# Altium PCB motordriver_mnt.PcbDoc (part 3 of 3)
Units mm, origin at the board's own origin, x right, y up, seen from the top; angles counter-clockwise.
Board outline 134.2 x 59.7 mm, 4 copper layers (Top Layer, Mid-Layer 2, Mid-Layer 1, Bottom Layer); 185 components, 161 nets, 637 pads, 1528 vias.
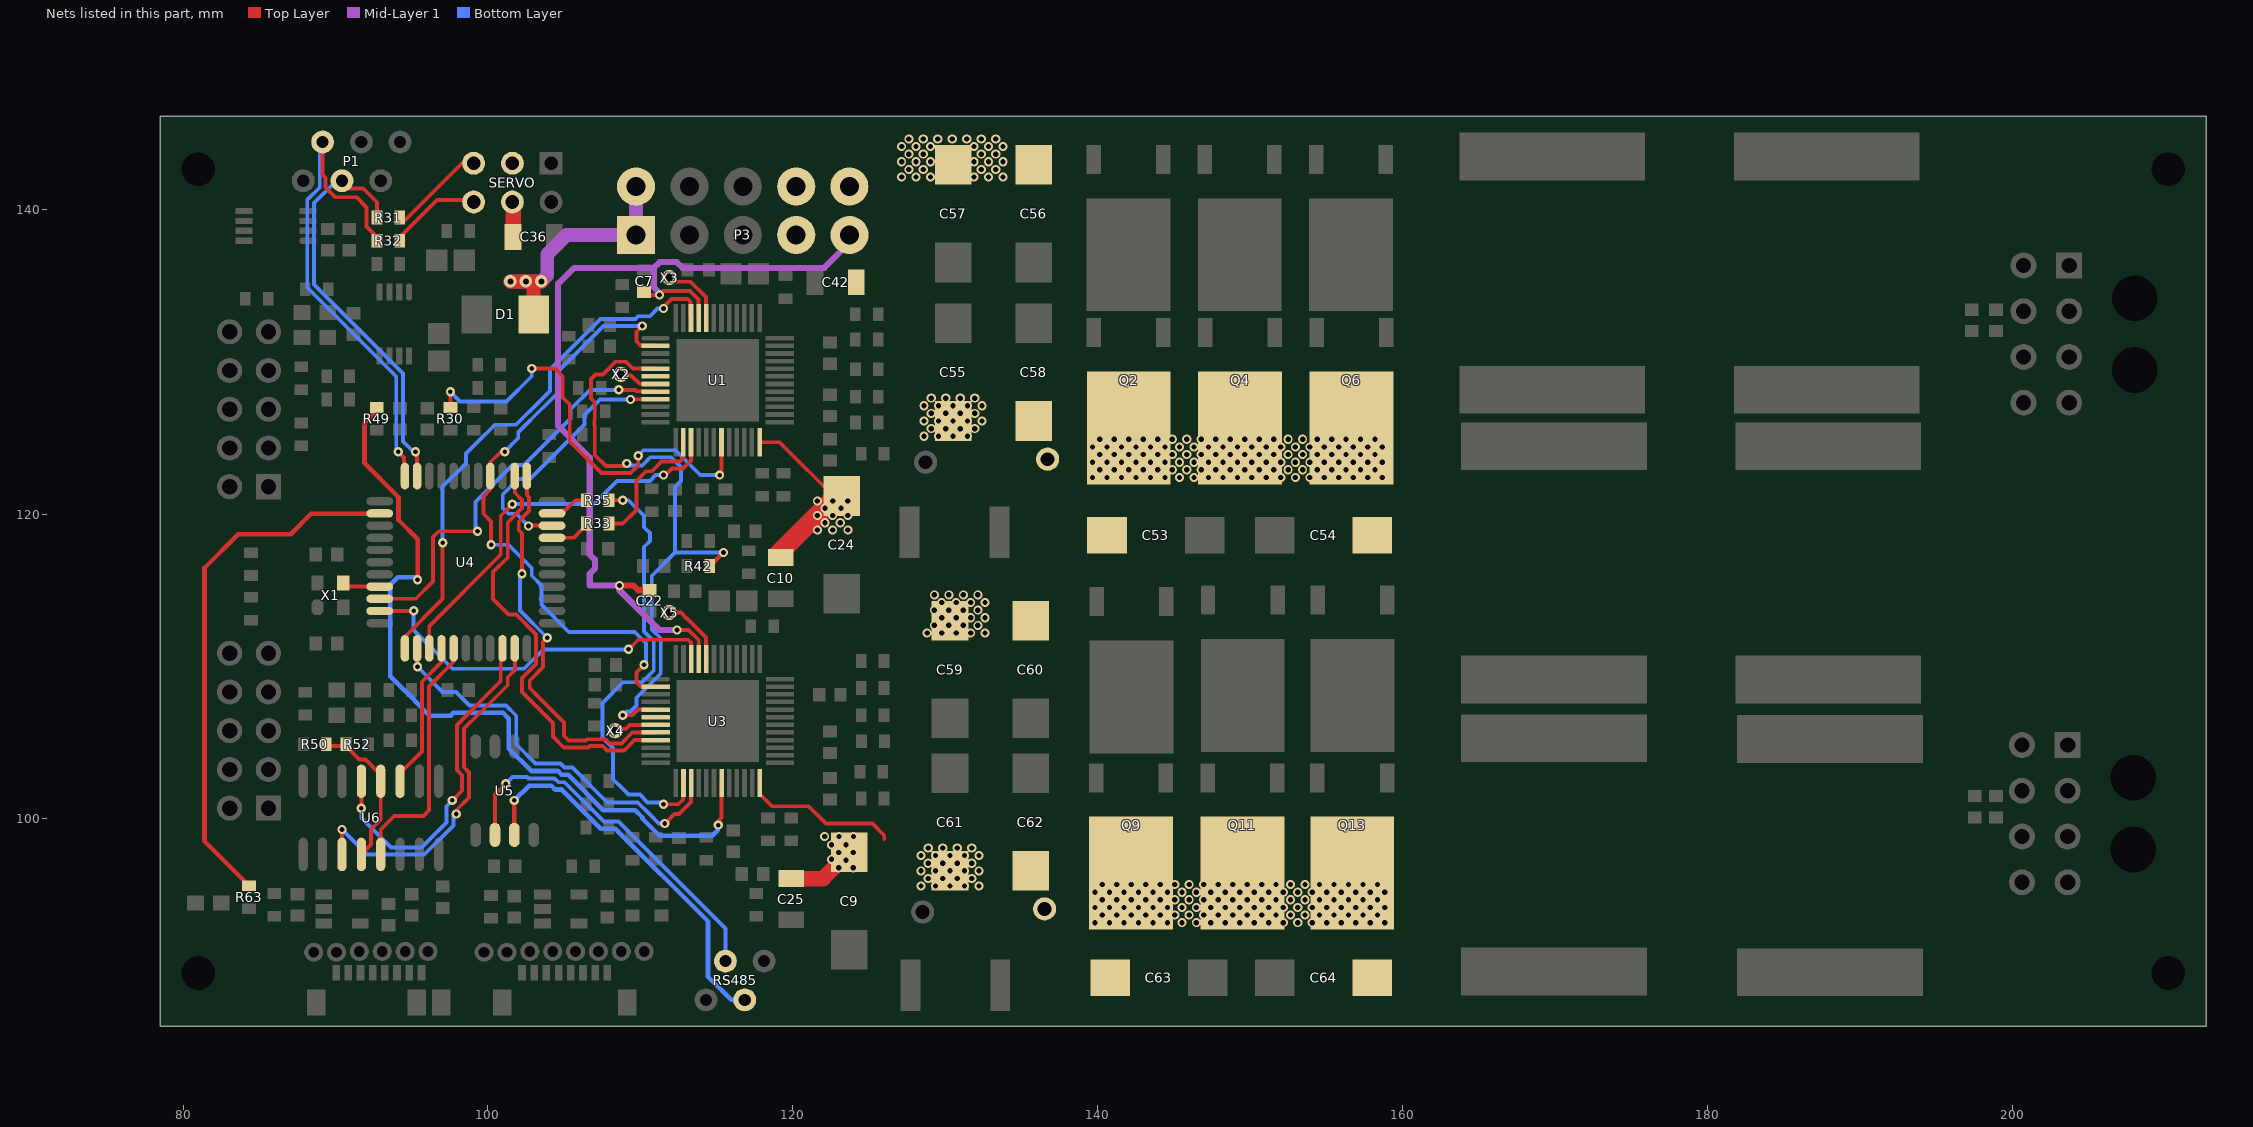
[diagram p5: the nets of this part, all layers, seen from the top]

## Via types
v1: diameter 0.6, hole 0.35, Top Layer to Bottom Layer, tented both sides, 1228 vias
v2: diameter 0.61, hole 0.305, Top Layer to Bottom Layer, tented both sides, 235 vias
v3: diameter 0.66, hole 0.33, Top Layer to Bottom Layer, tented top, 50 vias
v4: diameter 0.813, hole 0.406, Top Layer to Bottom Layer, tented both sides, 6 vias
v5: diameter 0.7, hole 0.4, Top Layer to Bottom Layer, tented both sides, 4 vias
v6: diameter 0.61, hole 0.305, Top Layer to Bottom Layer, 2 vias
v7: diameter 0.7, hole 0.4, Top Layer to Bottom Layer, tented bottom, 2 vias
v8: diameter 0.61/0.61/0.61/0.61 (per signal layer), hole 0.305, Top Layer to Bottom Layer, tented both sides, 1 vias

## Nets (pads, with @x,y where several pads share a name; then routed paths per layer and width w, separated by ;. In a path a pad name is that pad's centre, name@x,y a point inside that pad or via, vN(x,y) a via of type N, cw(c..) or ccw(c..) an arc to the next point about the centre after c; other vN are vias at no path point) (continued)
NetR30_2: R30.2 U1.19 | length 28.9
  Top Layer w0.254: R30.2@97.536,126.988 v8(97.536,128.016) ; v2(102.87,129.54) 104.394,129.54 104.902,129.032 104.902,127.644 105.359,127.187 105.359,124.765 107.442,122.682 109.356,122.682 109.855,123.181 v2(109.855,123.825) ; v2@115.312,122.678 U1.19@115.312,124.703
  Bottom Layer w0.254: v8(97.536,128.016) 98.171,127.381 101.219,127.381 102.87,129.032 v2(102.87,129.54) ; v2(109.855,123.825) 110.211,124.181 112.293,124.181 113.919,122.555 v2(115.19,122.554)
NetR31_2: R31.2 SERVO.5 | length 6
  Top Layer w0.254: 94.609,139.325 98.286,143.002 SERVO.5@99.06,143.002
NetR32_2: R32.2 SERVO.6 | length 6.5
  Top Layer w0.254: R32.2@94.222,137.922 94.473,137.922 94.234,138.161 94.234,138.176 96.647,140.589 98.933,140.589 SERVO.6@99.06,140.462
NetR33_1: R33.1 U4.8 | length 2.6
  Top Layer w0.254: U4.8@104.202,118.44 105.613,118.44 106.241,119.068 R33.1@106.495,119.068
NetR33_2: R33.2 U1.14 | length 8.9
  Top Layer w0.254: R33.2@107.938,119.126 108.192,119.38 108.839,119.38 109.728,120.269 109.728,122.174 110.363,122.809 110.744,122.809 111.383,123.448 112.599,123.448 112.792,123.641 112.792,124.683 U1.14@112.812,124.703
NetR35_1: R35.1 U4.10 | length 2.6
  Top Layer w0.254: U4.10@104.202,120.04 104.546,120.04 104.741,120.235 105.053,120.235 105.722,120.904 R35.1@106.438,120.904
NetR35_2: R35.2 U3.14 | length 29.5
  Top Layer w0.254: R35.2@107.938,120.904 v2(108.839,120.904) ; v2(111.506,100.965) 112.48,100.965 112.804,101.289 112.804,102.331 U3.14@112.824,102.351
  Bottom Layer w0.254: v2(108.839,120.904) 109.22,120.904 110.236,119.888 110.236,119.135 110.617,118.754 110.617,118.228 110.245,117.856 110.236,117.856 110.236,112.3 110.871,111.665 110.871,109.728 110.109,108.966 108.851,108.966 107.501,107.616 107.501,105.351 108.204,104.648 108.204,102.607 108.576,102.235 108.585,102.235 109.22,101.6 109.959,101.6 110.467,101.092 111.367,101.092 111.506,100.953 v2(111.506,100.965)
NetR42_2: R42.2 U1.5 U3.5 | length 41.6
  Top Layer w0.254: 106.971,125.841 106.971,126.127 ; 107.004,125.809 107.004,123.882 107.747,123.139 108.915,123.139 v2(109.093,123.317) ; 107.004,126.159 107.004,127.333 106.75,127.587 106.75,128.857 107.052,129.159 107.538,129.159 108.368,129.989 109.056,129.989 109.497,129.548 110.967,129.548 U1.5@110.987,129.528 ; v2@108.966,106.807 109.474,106.807 109.843,107.176 U3.5@110.999,107.176
  Top Layer w0.305: R42.2@114.542,116.586 114.554,116.586 v2(115.443,117.475)
  Bottom Layer w0.254: v2@108.966,106.807 108.966,106.934 109.093,107.061 109.356,107.061 109.728,107.433 109.728,107.95 110.287,108.509 110.298,108.509 111.328,109.539 111.328,111.855 110.744,112.439 110.744,115.951 112.268,117.475 ; v2(109.093,123.317) 109.22,123.19 110.118,123.19 110.49,123.562 110.49,123.571 110.642,123.723 112,123.723 112.649,123.075 112.649,122.153 112.268,121.772 112.268,117.475 ; v2(115.443,117.475) 112.268,117.475
  other v2: 108.839,106.807
NetR49_2: R49.2 U3.19 | length 51.4
  Top Layer w0.254: v2@115.062,99.822 115.324,100.084 U3.19@115.324,102.351
  Top Layer w0.305: R49.2@92.71,126.988 92.71,126.791 91.904,125.985 91.904,123.329 94.133,121.101 94.133,119.608 95.403,118.338 v2@95.403,115.723
  Bottom Layer w0.305: v2(95.377,115.697) 95.225,115.849 94.087,115.849 93.599,115.361 93.599,109.347 94.561,108.385 94.597,108.385 95.192,107.79 95.192,107.754 96.164,106.782 97.556,106.782 97.733,106.959 100.985,106.959 101.371,106.573 101.371,104.623 102.845,103.149 104.566,103.149 104.82,102.895 105.258,102.895 107.569,100.584 109.646,100.584 110.134,100.096 110.134,100.013 111.247,98.9 114.7,98.9 115.062,99.262 v2@115.062,99.6
  other v2: 115.1,99.6
NetR50_1: R50.1 R52.2 U6.4 U6.12 | length 10.1
  Top Layer w0.254: R50.1@89.396,104.775 90.69,104.775 91.559,103.906 91.955,103.906 92.964,102.897 U6.4@92.964,102.476 92.964,99.961 92.334,99.33 92.334,98.316 U6.12@91.694,97.676
NetR63_2: R63.2 U4.24 | length 35
  Top Layer w0.305: R63.2@84.328,95.619 81.407,98.54 81.407,116.459 83.629,118.681 87.058,118.681 88.392,120.015 92.877,120.015 U4.24@92.902,120.04
NetRS485_2: RS485.2 U5.6 | length 24.5
  Top Layer w0.254: U5.6@100.457,98.954 100.457,101.6 v2(101.168,102.311)
  Bottom Layer w0.254: v2(101.168,102.311) 101.6,102.743 102.569,102.743 102.645,102.667 104.366,102.667 104.62,102.413 105.026,102.413 107.597,99.842 108.556,99.842 115.57,92.828 RS485.2@115.57,90.678
NetRS485_3: RS485.3 U5.7 | length 25.7
  Top Layer w0.305: U5.7@101.727,98.954 v2(101.727,101.219)
  Bottom Layer w0.305: v2(101.727,101.219) 102.692,102.184 104.166,102.184 104.42,101.93 104.826,101.93 107.397,99.359 108.356,99.359 114.427,93.288 114.427,89.662 115.951,88.138 RS485.3@116.84,88.138
NetU1_2: U1.2 U3.2 U4.15 | length 41.1
  Top Layer w0.254: v2(100.203,117.983) 100.203,119.507 99.695,120.015 99.695,121.158 100.152,121.615 U4.15@100.152,122.49 100.152,123.393 v2@100.838,124.079 ; v2(110.109,132.334) 109.732,131.957 109.732,131.329 110.013,131.048 110.967,131.048 U1.2@110.987,131.028 ; v2(110.236,110.109) 109.744,109.617 109.744,108.977 110.025,108.696 110.979,108.696 U3.2@110.999,108.676
  Bottom Layer w0.254: v2@100.152,117.932 v2(100.203,117.983) 101.346,117.983 102.87,116.459 102.87,115.951 103.505,115.316 103.505,114.058 105.295,112.268 109.622,112.268 110.363,111.527 110.363,110.236 v2(110.236,110.109) ; v2(101.092,124.079) 101.981,124.968 101.981,125.358 103.623,127 103.632,127 104.521,127.889 104.521,129.286 107.569,132.334 v2@109.918,132.334 ; v2@110.045,132.461 v2@109.918,132.334 ; v2(110.109,132.334) v2@109.918,132.334
NetU1_6: U1.6
NetU1_7: U1.7 X2.1 | length 2.5
  Top Layer w0.254: X2.1@108.712,129.159 108.78,129.091 109.382,129.091 109.925,128.548 110.967,128.548 U1.7@110.987,128.528
NetU1_8: U1.8 U4.31 | length 27.2
  Top Layer w0.254: U4.31@92.902,114.44 95.263,114.44 96.393,115.57 96.393,118.491 96.774,118.872 v2(99.314,118.872) ; v2@108.683,128.241 108.781,128.143 109.683,128.143 109.779,128.048 110.967,128.048 U1.8@110.987,128.028
  Bottom Layer w0.254: v2(99.314,118.872) 99.187,118.999 99.187,120.798 101.605,123.215 102.364,123.215 105.41,126.261 105.41,126.873 106.68,128.143 v2(108.585,128.143) v2@108.585,128.261
NetU1_9: U1.9 U4.9 | length 18
  Top Layer w0.254: v2(102.656,119.213) 102.682,119.24 U4.9@104.202,119.24 ; v2(109.347,127.508) 109.359,127.508 109.457,127.606 109.457,127.618 109.474,127.635 109.581,127.528 U1.9@110.987,127.528
  Bottom Layer w0.254: v2(102.656,119.213) v2@102.656,119.223 ; v2@102.66,119.218 v2@102.656,119.223 ; v2(109.347,127.508) 109.359,127.508 109.457,127.606 109.428,127.635 109.301,127.508 107.338,127.508 106.324,126.494 106.324,125.882 102.743,122.301 101.984,122.301 100.965,121.282 100.965,120.387 101.337,120.015 101.863,120.015 v2@102.656,119.223
NetU1_15: U1.15 U4.36 | length 25.8
  Top Layer w0.254: U4.36@96.152,111.19 96.152,112.662 100.838,117.348 100.838,119.888 v2(101.6,120.65) ; v2@111.379,122.555 v2(111.506,122.555) ; v2@111.633,122.555 112.069,122.991 112.788,122.991 113.249,123.452 113.249,123.453 113.312,123.516 U1.15@113.312,124.703
  Bottom Layer w0.254: v2(101.6,120.65) 106.946,120.65 108.47,122.174 110.617,122.174 110.998,122.555 v2(111.506,122.555)
NetU1_44: U1.44 X3.1 | length 4.3
  Top Layer w0.254: X3.1@111.887,135.382 112.032,135.237 113.291,135.237 114.292,134.235 114.292,132.873 U1.44@114.312,132.853
NetU1_46: U1.46 U4.34 | length 35.4
  Top Layer w0.254: U4.34@94.552,111.19 94.552,111.951 97.028,114.427 v2(97.028,118.11) ; v2(111.506,133.477) 111.506,133.589 112.025,134.108 113.099,134.108 113.292,133.915 113.292,132.873 U1.46@113.312,132.853
  Bottom Layer w0.254: v2(97.028,118.11) 97.028,121.793 98.552,123.317 98.552,123.961 99.305,124.714 99.314,124.714 100.457,125.857 101.833,125.857 103.434,127.457 103.443,127.457 104.064,128.078 104.064,129.475 107.38,132.791 109.668,132.791 109.846,132.969 110.617,132.969 111.125,133.477 v2(111.506,133.477)
NetU3_6: U3.6
NetU3_7: U3.7 X4.1 | length 2.8
  Top Layer w0.254: X4.1@108.331,105.791 108.458,105.918 109.058,105.918 109.296,106.156 110.979,106.156 U3.7@110.999,106.176
NetU3_8: U3.8 U4.12 | length 26.4
  Top Layer w0.254: v2(102.235,116.078) 102.235,118.736 102.021,118.95 102.021,119.477 102.235,119.691 ; 102.235,119.729 102.692,120.186 102.692,121.102 102.552,121.243 U4.12@102.552,122.49 U4.12@102.692,122.35 ; v2(103.886,111.887) 103.614,111.615 103.614,109.973 102.743,109.102 102.743,108.576 103.242,108.077 103.251,108.077 104.996,106.332 104.996,105.458 105.298,105.156 106.405,105.156 106.482,105.232 107.716,105.232 107.987,104.961 108.748,104.961 109.463,105.676 U3.8@110.999,105.676 U3.8@110.979,105.656
  Bottom Layer w0.254: v2(102.235,116.078) 102.108,115.951 102.108,113.665 v2(103.886,111.887)
NetU3_9: U3.9 U4.13 | length 28.2
  Top Layer w0.254: U4.13@101.752,122.49 101.752,121.396 102.235,120.913 102.235,120.387 101.295,119.447 101.295,117.159 100.33,116.193 100.33,114.418 101.337,113.411 101.854,113.411 103.157,112.108 103.157,110.163 102.235,109.241 102.235,108.331 104.267,106.299 104.267,105.398 104.967,104.699 106.595,104.699 106.671,104.775 107.526,104.775 107.798,104.504 108.937,104.504 109.609,105.176 U3.9@110.999,105.176
NetU3_15: U3.15 U4.35 | length 26.3
  Top Layer w0.254: U4.35@95.352,111.19 95.352,110.007 v2(95.377,109.982) ; v2(111.6,99.7) 112.23,100.33 112.522,100.33 113.304,101.112 113.304,102.331 U3.15@113.324,102.351
  Bottom Layer w0.254: v2(95.377,109.982) 97.028,108.331 97.896,108.331 98.785,107.442 101.184,107.442 101.854,106.772 101.854,104.902 103.124,103.632 104.766,103.632 105.02,103.378 105.537,103.378 107.823,101.092 109.82,101.092 110.617,100.295 110.617,100.283 111.2,99.7 v2(111.6,99.7)
NetU3_44: U3.44 X5.1 | length 4.5
  Top Layer w0.254: X5.1@111.887,113.538 112.649,113.538 113.03,113.157 113.042,113.157 114.304,111.895 114.304,110.521 U3.44@114.324,110.501
NetU3_46: U3.46 U4.32 | length 24.7
  Top Layer w0.254: U4.32@92.902,113.64 95.098,113.64 v2(95.123,113.665) ; v2(109.22,111.125) 109.851,111.756 113.111,111.756 113.304,111.563 113.304,110.521 U3.46@113.324,110.501
  Bottom Layer w0.254: v2(95.123,113.665) 95.123,112.398 97.666,109.855 102.362,109.855 103.632,111.125 v2(109.22,111.125)
NetU4_30: U4.30 X1.3 | length 2.5
  Top Layer w0.254: X1.3@90.512,115.481 90.753,115.24 U4.30@92.902,115.24
PGC: P1.5 R32.1 U4.22 | length 33.8
  Top Layer w0.254: P1.5@89.154,144.399 89.154,142.24 89.344,142.05 89.344,141.412 89.977,140.779 91.377,140.779 92.042,140.114 92.042,138.859 92.722,138.179 R32.1@92.722,137.922 ; v2(94.107,124.079) 94.488,123.698 94.488,122.554 U4.22@94.552,122.49
  Bottom Layer w0.254: P1.5@89.154,144.399 88.964,144.209 88.964,141.412 88.143,140.59 88.143,134.869 93.98,129.032 93.98,124.206 v2(94.107,124.079) v2@94.171,124.015
PGD: P1.4 R31.1 U4.21 | length 28.3
  Top Layer w0.254: P1.4@90.297,142.113 90.297,141.744 90.69,141.351 91.821,141.351 92.722,140.45 R31.1@92.722,139.446 ; P1.4@90.424,141.732 P1.4@90.424,141.859 P1.4@90.424,142.113 ; v2(95.25,124.079) 95.352,123.977 U4.21@95.352,122.49
  Bottom Layer w0.254: P1.4@90.17,141.732 P1.4@90.424,141.732 ; P1.4@90.424,141.859 90.059,141.859 88.6,140.4 88.6,135.059 94.437,129.221 94.437,124.765 94.987,124.215 95.25,124.215 v2(95.25,124.079)
QEI1_A: U4.37 U6.3 | length 9.8
  Top Layer w0.254: U6.3@94.234,102.997 95.664,104.427 95.664,107.3 95.664,108.999 96.952,110.287 U4.37@96.952,111.19
  Top Layer w0.305: U6.3@94.234,102.476 U6.3@94.234,102.997
QEI1_B: U4.38 U6.13 | length 16.6
  Top Layer w0.254: U6.13@92.964,97.676 92.964,99.314 93.853,100.203 95.767,100.203 96.139,100.575 96.139,104.503 96.121,104.521 96.121,108.694 97.752,110.325 U4.38@97.752,111.19
QEI2_A: U4.42 U6.5 | length 22.7
  Top Layer w0.254: v2(91.694,100.711) U6.5@91.694,102.476 ; v2(97.663,101.219) 98.298,101.854 98.298,102.87 97.968,103.2 97.968,106.167 100.838,109.037 100.838,111.076 U4.42@100.952,111.19
  Bottom Layer w0.254: v2(91.694,100.711) 91.694,100.076 93.65,98.12 95.631,98.12 97.282,99.771 97.282,100.838 97.599,101.155 v2@97.727,101.155
QEI2_B: U4.43 U6.11 | length 24.1
  Top Layer w0.254: U6.11@90.424,97.676 v2(90.424,99.314) ; v2(97.917,100.33) 97.917,100.575 98.755,101.413 98.755,103.059 98.425,103.39 98.425,105.927 99.432,106.934 99.462,106.934 101.295,108.768 101.295,109.296 101.774,109.775 101.774,110.439 101.752,110.462 U4.43@101.752,110.486 ; U4.43@101.752,111.19 U4.43@101.752,110.486 ; U4.43@101.798,110.439 U4.43@101.752,110.486
  Bottom Layer w0.254: v2(90.424,99.314) 92.075,97.663 95.82,97.663 97.739,99.582 97.739,100.152 v2(97.917,100.33)
VMOTOR: C7.2 C9.1 C10.2 C22.2 C24.1 C25.2 C42.2 C53.1 C54.1 C55.1 C56.1 C57.1 C58.1 C59.1 C60.1 C61.1 C62.1 C63.1 C64.1 P3.5 pad.0@136.5,94.1 pad.0@136.7,123.6 pad.@123.698,141.478 Q2.4 Q4.4 Q6.4 Q9.4 Q11.4 Q13.4 U1.24 U1.45 U3.24 U3.45 | length 87.7
  Top Layer w0.254: C7.2@110.228,134.445 C7.2@110.312,134.438 ; C7.2@110.306,134.366 v2(111.252,134.366) ; 111.488,134.62 113.261,134.62 113.812,134.069 U1.45@113.812,132.853 ; v2(112.395,112.395) 113.157,112.395 113.824,111.728 U3.45@113.824,110.501 ; U1.24@117.812,124.703 119.137,124.703 122.936,120.904 C24.1@122.834,120.802 ; U3.24@117.824,102.351 117.824,101.632 118.618,100.838 121.031,100.838 122.174,99.695 125.222,99.695 125.984,98.933 125.984,98.679
  Top Layer w0.406: v2(108.623,115.316) 109.539,115.316 109.855,115 C22.2@110.617,115
  Top Layer w1.016: C10.2@118.999,117.174 C10.2@118.999,117.348 ; C25.2@119.888,96.092 121.975,96.092 C9.1@123.698,97.815 ; C24.1@122.453,120.802 C24.1@122.834,120.802
  Top Layer w1.27: C10.2@118.999,117.348 C24.1@122.453,120.802
  Mid-Layer 1 w0.406: v2@111.173,134.572 110.871,134.874 110.871,136.144 ; v2(112.395,112.395) 111.24,112.395 108.585,115.05 108.585,115.316 106.68,115.316 106.68,116.088 107.01,116.418 107.01,117.008 106.68,117.338 106.68,123.698 104.6,125.778 104.6,135.1 105.644,136.144 110.871,136.144 ; P3.5@123.713,138.303 123.713,137.81 122.047,136.144 112.776,136.144 112.395,136.525 111.252,136.525 110.871,136.144
  other v1: 139.81,93.2 140.76,93.2 141.71,93.2 142.66,93.2 143.61,93.2 144.56,93.2 145.51,93.2 146.46,93.2 147.41,93.2 148.36,93.2 149.31,93.2 150.26,93.2 151.21,93.2 152.16,93.2 153.11,93.2 154.06,93.2 155.01,93.2 155.96,93.2 156.91,93.2 157.86,93.2 158.81,93.2 140.285,93.7 141.235,93.7 142.185,93.7 143.135,93.7 144.085,93.7 145.035,93.7 145.985,93.7 146.935,93.7 147.885,93.7 148.835,93.7 149.785,93.7 150.735,93.7 151.685,93.7 152.635,93.7 153.585,93.7 154.535,93.7 155.485,93.7 156.435,93.7 157.385,93.7 158.335,93.7 139.81,94.2 140.76,94.2 141.71,94.2 142.66,94.2 143.61,94.2 144.56,94.2 145.51,94.2 146.46,94.2 147.41,94.2 148.36,94.2 149.31,94.2 150.26,94.2 151.21,94.2 152.16,94.2 153.11,94.2 154.06,94.2 155.01,94.2 155.96,94.2 156.91,94.2 157.86,94.2 158.81,94.2 140.285,94.7 141.235,94.7 142.185,94.7 143.135,94.7 144.085,94.7 145.035,94.7 145.985,94.7 146.935,94.7 147.885,94.7 148.835,94.7 149.785,94.7 150.735,94.7 151.685,94.7 152.635,94.7 153.585,94.7 154.535,94.7 155.485,94.7 156.435,94.7 157.385,94.7 158.335,94.7 139.81,95.2 140.76,95.2 141.71,95.2 142.66,95.2 143.61,95.2 144.56,95.2 145.51,95.2 146.46,95.2 147.41,95.2 148.36,95.2 149.31,95.2 150.26,95.2 151.21,95.2 152.16,95.2 153.11,95.2 154.06,95.2 155.01,95.2 155.96,95.2 156.91,95.2 157.86,95.2 158.81,95.2 128.4,95.6 129.35,95.6 130.3,95.6 131.25,95.6 132.2,95.6 140.285,95.7 141.235,95.7 142.185,95.7 143.135,95.7 144.085,95.7 145.035,95.7 145.985,95.7 146.935,95.7 147.885,95.7 148.835,95.7 149.785,95.7 150.735,95.7 151.685,95.7 152.635,95.7 153.585,95.7 154.535,95.7 155.485,95.7 156.435,95.7 157.385,95.7 158.335,95.7 128.875,96.1 129.825,96.1 130.775,96.1 131.725,96.1 128.4,96.6 129.35,96.6 130.3,96.6 131.25,96.6 132.2,96.6 123,96.8 123.95,96.8 128.875,97.1 129.825,97.1 130.775,97.1 131.725,97.1 123.475,97.3 122.525,97.35 128.4,97.6 129.35,97.6 130.3,97.6 131.25,97.6 132.2,97.6 123,97.8 123.95,97.8 128.875,98.1 129.825,98.1 130.775,98.1 131.725,98.1 122.525,98.3 123.475,98.3 122.075,98.85 123.025,98.85 123.975,98.85 128.8,112.2 129.75,112.2 130.7,112.2 131.65,112.2 132.6,112.2 129.275,112.7 130.225,112.7 131.175,112.7 132.125,112.7 129.75,113.2 130.7,113.2 131.65,113.2 132.6,113.2 129.275,113.7 130.225,113.7 131.175,113.7 132.125,113.7 129.75,114.2 130.7,114.2 131.65,114.2 132.6,114.2 129.275,114.7 130.225,114.7 131.175,114.7 132.125,114.7 121.6,118.95 122.6,118.95 123.6,118.95 122.1,119.425 123.1,119.425 121.6,119.9 122.6,119.9 123.6,119.9 122.1,120.375 123.15,120.375 121.6,120.85 122.6,120.85 123.6,120.85 139.65,122.4 140.6,122.4 141.55,122.4 142.5,122.4 143.45,122.4 144.4,122.4 145.35,122.4 146.3,122.4 147.25,122.4 148.2,122.4 149.15,122.4 150.1,122.4 151.05,122.4 152,122.4 152.95,122.4 153.9,122.4 154.85,122.4 155.8,122.4 156.75,122.4 157.7,122.4 158.65,122.4 140.125,122.9 141.075,122.9 142.025,122.9 142.975,122.9 143.925,122.9 144.875,122.9 145.825,122.9 146.775,122.9 147.725,122.9 148.675,122.9 149.625,122.9 150.575,122.9 151.525,122.9 152.475,122.9 153.425,122.9 154.375,122.9 155.325,122.9 156.275,122.9 157.225,122.9 158.175,122.9 139.65,123.4 140.6,123.4 141.55,123.4 142.5,123.4 143.45,123.4 144.4,123.4 145.35,123.4 146.3,123.4 147.25,123.4 148.2,123.4 149.15,123.4 150.1,123.4 151.05,123.4 152,123.4 152.95,123.4 153.9,123.4 154.85,123.4 155.8,123.4 156.75,123.4 157.7,123.4 158.65,123.4 140.125,123.9 141.075,123.9 142.025,123.9 142.975,123.9 143.925,123.9 144.875,123.9 145.825,123.9 146.775,123.9 147.725,123.9 148.675,123.9 149.625,123.9 150.575,123.9 151.525,123.9 152.475,123.9 153.425,123.9 154.375,123.9 155.325,123.9 156.275,123.9 157.225,123.9 158.175,123.9 139.65,124.4 140.6,124.4 141.55,124.4 142.5,124.4 143.45,124.4 144.4,124.4 145.35,124.4 146.3,124.4 147.25,124.4 148.2,124.4 149.15,124.4 150.1,124.4 151.05,124.4 152,124.4 152.95,124.4 153.9,124.4 154.85,124.4 155.8,124.4 156.75,124.4 157.7,124.4 158.65,124.4 140.125,124.9 141.075,124.9 142.025,124.9 142.975,124.9 143.925,124.9 144.875,124.9 145.825,124.9 146.775,124.9 147.725,124.9 148.675,124.9 149.625,124.9 150.575,124.9 151.525,124.9 152.475,124.9 153.425,124.9 154.375,124.9 155.325,124.9 156.275,124.9 157.225,124.9 158.175,124.9 128.6,125.1 129.55,125.1 130.5,125.1 131.45,125.1 129.075,125.6 130.025,125.6 130.975,125.6 131.925,125.6 128.6,126.1 129.55,126.1 130.5,126.1 131.45,126.1 132.4,126.1 129.075,126.6 130.025,126.6 130.975,126.6 131.925,126.6 128.6,127.1 129.55,127.1 130.5,127.1 131.45,127.1 132.4,127.1 129.075,127.6 130.025,127.6 130.975,127.6 131.925,127.6 127.125,142.1 128.075,142.1 129.025,142.1 131.875,142.1 132.825,142.1 133.775,142.1 127.6,142.6 128.55,142.6 132.35,142.6 133.3,142.6 127.125,143.1 128.075,143.1 129.025,143.1 131.875,143.1 132.825,143.1 133.775,143.1 127.6,143.6 128.55,143.6 132.35,143.6 133.3,143.6 127.125,144.1 128.075,144.1 129.025,144.1 131.875,144.1 132.825,144.1 133.775,144.1 127.6,144.6 128.55,144.6 129.5,144.6 130.45,144.6 131.4,144.6 132.35,144.6 133.3,144.6
VSERVO: C36.2 P3.4 pad.@120.213,141.478 SERVO.3 SERVO.4 | length 2.6
  Top Layer w1.016: SERVO.4@101.6,140.716 SERVO.4@101.6,140.462 101.647,140.415 C36.2@101.647,138.176
VSIG: D1.A P3.1 pad.@109.713,141.478 | length 17.7
  Top Layer w0.914: v4(101.473,135.255) v4(102.489,135.255) 102.997,135.255 ; D1.A@102.997,133.096 102.997,135.255 ; v4(103.505,135.255) 102.997,135.255
  Mid-Layer 1 w0.914: v4(101.473,135.255) v4(102.489,135.255) v4(103.505,135.255) 103.886,135.636 103.886,137.033 105.156,138.303 P3.1@109.713,138.303 pad.@109.713,141.478
pads on no net: MOTOR1.0 MOTOR2.0 P1.6 P2.A P2.B P7.7 P7.8 P7.A P7.B6 P7.B8 QE1.1 QE1.4 QE2.1 QE2.4 RS485.1 U1.1 U1.13 U1.37 U1.47 U1.48 U2.2 U3.1 U3.13 U3.37 U3.47 U3.48 U7.2
copper on no net: | length 1
  Bottom Layer w0.254: 204.9,95.45 204.9,96.45

## Polygon pours and split planes (outlines as drawn)
AGND on Top Layer "Top Layer-AGND 1" (solid, remove dead copper, pour order 98): 129.3,137.8 137,137.8 137,131.2 129.3,131.2
AGND on Top Layer "Bottom Layer-No Net" (solid, remove dead copper, pour order 83): 118.364,111.379 120.142,111.379 120.142,102.743 120.904,101.981 120.904,101.219 118.364,101.219
AGND on Top Layer "Bottom Layer-No Net" (solid, remove dead copper, pour order 74): 119.888,135.89 119.888,132.842 120.523,132.842 120.523,131.953 109.601,131.953 109.601,135.128 110.998,136.525 118.364,136.525 118.999,135.89
AGND on Top Layer "Top Layer-AGND" (solid, pour order 92): 111.633,136.779 111.633,145.542 122.047,145.542 122.047,133.477 120.269,133.477 120.269,136.271 119.126,136.271 118.618,136.779
AGND on Top Layer "Top Layer-AGND" (solid, pour order 90): 120.142,86.995 128.524,86.995 128.524,90.932 126.746,90.932 124.841,92.837 120.142,92.837
AGND on Top Layer "Top Layer-DGND" (solid, pour order 80): 106.553,100.584 115.062,100.584 115.062,96.139 106.553,96.139 106.553,100.584
VMOTOR on Top Layer "Top Layer-VMOTOR" (solid, pour order 88): 120.491,99.885 120.491,94.17 126.841,94.17 126.841,99.069 125.934,99.885 120.491,99.885
VMOTOR on Top Layer "Top Layer-VMOTOR 1" (solid, pour order 91): 120.142,122.708 120.142,117.856 126.238,117.856 126.238,122.708
VMOTOR on Top Layer "Top Layer-VMOTOR 2" (solid, remove dead copper, pour order 93): 122.428,145.542 129.7,145.542 129.7,134.366 122.428,134.366 122.428,145.542
AGND on Top Layer "Top Layer-AGND 2" (solid, pour order 89): 120.142,111.633 120.142,114.935 121.793,116.586 122.936,116.586 126.237,116.585 126.238,111.633
DGND on Top Layer "Top Layer-DGND 1" (solid, pour order 65): 79.502,145.542 99.568,145.542 99.568,136.525 104.902,136.525 104.902,95.758 115.951,95.758 115.951,92.964 116.967,91.948 119.38,91.948 119.38,86.995 79.502,86.995
AGND on Top Layer "Top Layer-DGND" (solid, pour order 73): 106.553,125.73 106.553,117.348 114.681,117.348 114.681,125.73
B1 on Top Layer "Top Layer-NetL1_2" (solid, remove dead copper, pour order 72): 211.546,137.8 211.546,124 195.5,124 195.5,137.8
A2 on Top Layer "Top Layer-NetL4_2" (solid, remove dead copper, pour order 71): 211.741,107.986 211.741,88.4 202.041,88.4 202.041,107.986
AGND on Top Layer "AGND" (solid, remove dead copper, pour order 55): 127,120.5 129.5,120.5 131.2,118.8 131.3,118.7 131.3,115.8 125,115.8 124.9,115.9 126.9,117.9 127,117.9
C2 on Top Layer "C2" (solid, remove dead copper, pour order 54): 196.6,106.3 196.4,106.1 196.4,95.848 192.553,95.848 192.5,95.9 192.5,103.8 195,106.3
3V3_CLEAN on Mid-Layer 1 "Top Layer-No Net" (solid, pour order 61): 79.502,95.758 79.502,86.995 97.536,86.995 97.536,95.758
VMOTOR on Mid-Layer 1 "Mid-Layer 1-VMOTOR 1" (solid, pour order 60): 104.775,136.779 120.904,136.779 120.904,135.89 104.775,135.89 104.775,136.779
5V_M1 on Mid-Layer 1 "Mid-Layer 1-5V_M1 1" (solid, pour order 70): 120.142,135.509 120.142,115.062 106.553,115.062 106.553,123.571 104.775,125.349 104.826,135.509
5V_M2 on Mid-Layer 1 "Mid-Layer 1-5V_M2" (solid, pour order 79): 120.142,114.681 106.553,114.681 106.553,112.649 105.156,111.252 105.156,105.41 106.553,104.013 106.553,96.139 120.142,96.139
3V3 on Mid-Layer 1 "Mid-Layer 1-3V3 1" (solid, pour order 87): 104.394,138.176 104.394,125.222 106.172,123.444 106.172,112.776 104.775,111.379 104.775,105.283 106.172,103.886 106.172,96.139 97.917,96.139 97.917,106.807 87.249,106.807 87.249,145.542 99.568,145.542 99.568,138.176
5V on Mid-Layer 1 "Mid-Layer 1-5V" (solid, pour order 84): 79.502,96.139 79.502,145.542 86.741,145.542 86.868,106.426 97.536,106.426 97.536,96.139
5V_CLEAN on Mid-Layer 1 "Top Layer-No Net" (solid, pour order 68): 97.917,95.758 97.917,86.995 111.379,86.995 111.379,95.758
3V3 on Mid-Layer 1 "Top Layer-No Net" (solid, pour order 76): 111.76,95.758 120.142,95.758 120.142,86.995 111.76,86.995
VSERVO on Mid-Layer 1 "Mid-Layer 1-No Net" (solid, pour order 57): 99.949,145.542 99.949,138.684 109.093,138.684 110.49,137.287 121.793,137.287 121.793,145.542
VMOTOR on Mid-Layer 1 "VMOTOR-MID" (solid, remove dead copper, pour order 58): 122.1,145.2 122.1,136.586 128.1,136.586 128.1,92.7 160,92.7 160,145.2
VMOTOR on Mid-Layer 1 "Mid-Layer 1-VMOTOR" (solid, remove dead copper, pour order 82): 120.7,122.6 120.7,116.9 121,117.2 130.6,117.2 130.6,122.6
VMOTOR on Mid-Layer 1 "Mid-Layer 1-VMOTOR 2" (solid, remove dead copper, pour order 81): 121.462,99.359 121.462,93.659 121.762,93.959 131.362,93.959 131.362,99.359
AGND on Mid-Layer 2 "Mid-Layer 2-AGND 2" (solid, pour order 75): 122.428,130.825 116.84,130.795 116.84,102.87 122.428,102.941 122.428,110.475 120.015,112.903 120.015,121.666 122.428,124.023
AGND on Mid-Layer 2 "Mid-Layer 2-AGND" (solid, pour order 96): 99.695,145.542 99.695,138.557 104.775,138.557 104.775,125.349 107.315,122.809 107.315,113.411 105.156,111.252 105.156,105.41 107.315,103.251 107.315,96.139 121.031,96.139 122.428,97.536 122.428,110.744 120.269,112.903 120.269,121.539 122.428,123.698 122.428,145.542
AGND on Mid-Layer 2 "Top Layer-AGND" (solid, pour order 94): 118.364,144.871 118.364,133.464 124.46,133.464 124.46,145.542 118.364,145.542 118.364,144.871
AGND on Mid-Layer 2 "Mid-Layer 2-AGND 1" (solid, pour order 95): 107.315,133.604 107.315,131.445 109.22,131.445 109.22,133.604 107.315,133.604
DGND on Mid-Layer 2 "Mid-Layer 2-DGND" (solid, pour order 97): 79.502,86.995 118.745,86.995 118.745,95.758 106.934,95.758 106.934,103.124 104.775,105.283 104.775,111.379 106.934,113.538 106.934,122.682 104.394,125.222 104.394,138.176 99.314,138.176 99.314,145.542 79.502,145.542
AGND on Mid-Layer 2 "AGND-MID2" (solid, remove dead copper, pour order 64): 128,137.9 163.4,137.9 163.4,87.3 163.289,87.388 128,87.388
AGND on Mid-Layer 2 "AGND-MID2" (solid, remove dead copper, pour order 66): 111.9,145.2 112,145.1 131.8,145.1 131.8,132.1 131.4,131.7 130.5,132.6 111.9,132.6
AGND on Mid-Layer 2 "Mid-Layer 2-AGND 3" (solid, remove dead copper, pour order 78): 205.7,132.4 205.7,128.3 158.2,128.3 158.2,132.4
AGND on Mid-Layer 2 "Mid-Layer 2-AGND2" (solid, remove dead copper, pour order 77): 205.62,100.881 205.62,96.781 158.12,96.781 158.12,100.881
AGND on Mid-Layer 2 "Mid-Layer 2-No Net" (solid, remove dead copper, pour order 85): 129.1,124.1 129.1,87.4 119.8,87.4 119.8,95.7 121.9,95.7 123.3,97.1 123.3,110.7 123.3,110.8 120.7,113.4 120.7,121.4 123.4,124.1
VMOTOR on Bottom Layer "Bottom Layer-VMOTOR 1" (solid, remove dead copper, pour order 101): 139.46,100.1 139.46,87.035 139.5,86.995 212.079,86.995 212.079,115.021 212,115.1 211.8,114.9 181.8,114.9 181.8,103.9 181.9,103.8 181.8,103.9 139.5,103.9
VMOTOR on Bottom Layer "Bottom Layer-VMOTOR" (solid, remove dead copper, pour order 100): 139.3,121.9 159.3,121.9 159.3,111.7 171.7,111.7 172.483,111.8 208.281,111.8 208.444,111.931 211.55,114.43 211.55,145.2 139.3,145.2
NetQ3_3 on Bottom Layer "Bottom Layer-NetQ3_3" (solid, remove dead copper, pour order 99): 133.044,117.1 137.8,117.1 137.8,145.2 132.9,145.2 132.9,117.1
DGND on Bottom Layer "Bottom Layer-DGND" (solid, pour order 86): 79.502,86.995 79.502,145.542 97.155,145.542 97.155,137.922 102.108,137.922 106.934,133.096 106.934,122.174 108.966,120.142 108.966,109.855 106.934,107.823 106.934,95.758 119.126,95.758 119.126,86.995
AGND on Bottom Layer "Bottom Layer-No Net" (solid, pour order 67): 111.642,101.727 117.602,101.727 118.745,100.584 123.444,100.584 125.222,102.362 125.222,110.617 123.952,111.887 121.793,111.887 120.396,113.284 120.396,123.19 121.412,124.206 123.317,124.206 125.857,126.746 125.857,129.54 125.222,130.175 125.222,133.35 120.523,133.35 120.015,133.858 120.015,134.493 122.047,136.525 122.047,145.542 97.79,145.542 97.79,140.843 98.171,140.462 98.171,138.303 102.235,138.303 107.442,133.096 107.442,129.159 112.649,123.952 112.649,117.221 111.252,115.824 111.252,112.649 111.76,112.141 111.76,109.347 110.236,107.823 110.236,107.315 109.474,106.553 109.474,103.886
A1 on Bottom Layer "Bottom Layer-NetL1_2" (solid, remove dead copper, pour order 69): 201.85,139.3 211.55,139.3 211.55,123.9 201.85,123.9
NetQ10_3 on Bottom Layer "Bottom Layer-NetQ10_3" (solid, remove dead copper, pour order 63): 138.1,115.9 132.9,115.9 132.9,87.4 138.1,87.4
AGND on Bottom Layer "AGND" (solid, remove dead copper, pour order 62): 117.2,145.542 131.3,145.542 131.3,115.9 117.2,115.9 117.2,145.542
VMOTOR on Bottom Layer "VMOTOR" (solid, remove dead copper, pour order 59): 139.3,125.8 159.66,125.8 159.66,116.44 139.3,116.44 139.3,125.8
AGND on Bottom Layer "AGND" (solid, remove dead copper, pour order 56): 118.1,112 131.25,112 131.25,95.6 122.7,95.6 118.1,100.2

## Keep-outs
Keep-Out Layer:
  lines w0.254: 109.9,86.995 212.079,86.995 212.079,145.542 79.121,145.542 79.121,86.995 110.744,86.995
Multi-Layer:
  circle w2: c210.2,89.9 r1
  circle w2: c81,89.9 r1
  circle w2: c-26.8,84.7 r1
  circle w2: c-33.2,136.7 r1
  circle w2: c81,142.6 r1
  circle w2: c210.2,142.6 r1

## Other copper
Top Layer:
  rectangle net B1: 201.9,134.8 205.8,137.8
  rectangle net DGND: 83.247,137.522 84.753,140.278
  rectangle net DGND: 92.475,129.608 95.231,131.114
  rectangle net NetC20_2: 139.3,101.7 140.4,111.6
  rectangle net NetC21_2: 146.6,101.7 147.7,111.6
  rectangle net NetC23_2: 153.8,101.7 154.9,111.6
  rectangle net NetC5_2: 139.14,130.9 140.24,140.8
  rectangle net NetC6_2: 145.3,130.9 147.54,140.8
  rectangle net NetC8_2: 153.74,130.9 154.84,140.8
  rectangle net NetC8_2: 153.74,137.1 175.9,140.8
  rectangle net NetC8_2: 163.7,137.1 178.3,145
  rectangle net NetC5_2: 160,119.2 178.6,126
  rectangle net NetC23_2: 160,100.2 178.4,107.1
  region net A1: 176,107.6 176,118.7 163.8,118.7 163.8,107.6
  region net A1: 200.2,118.7 172.3,118.7 172.3,115 200.2,115
  region net NetC21_2: 194,114.4 181.8,114.4 181.8,107.6 194,107.6
  rectangle net B2: 181.8,119.252 194,126.052
  rectangle net NetC6_2: 179.1,137.1 193.9,145
  region net C1: 178.5,126.6 178.5,136.6 163.7,136.6 163.7,126.6
  region net C1: 196.6,136.6 172.2,136.6 172.2,132.9 196.6,132.9
  region net B1: 195.9,132.4 179.2,132.4 179.2,126.6 195.9,126.6
  rectangle net NetQ3_3: 138.2,142.3 143.1,145
  rectangle net NetQ3_3: 145.5,142.3 150.4,145
  rectangle net NetQ3_3: 152.8,142.3 157.7,145
  region net NetQ3_3: 137.8,117.1 137.8,121.9 134.4,121.9 134.4,117.1
  rectangle net NetQ3_3: 133.8,117.1 137.8,120.5
  rectangle net VMOTOR: 126.3,141.3 137.3,145.2
  rectangle net VMOTOR: 128.2,124.505 137.365,128.405
  region net VMOTOR: 139.3,126.2 139.3,117.035 142.905,117.035 142.905,126.2
  region net VMOTOR: 155.695,126.165 155.695,117 159.3,117 159.3,126.165
  rectangle net AGND: 143.7,116.5 155.2,121.5
  rectangle net AGND: 127,112.5 128.3,119.2
  rectangle net AGND: 125.7,112.5 128.3,116.6
  region net NetC23_2: 163.4,107.9 153.8,107.9 153.8,104.2 163.4,104.2
  rectangle net VMOTOR: 139.46,92.7 159.46,100.1
  rectangle net AGND: 129.1,101.3 136.8,107.9
  region net VMOTOR: 139.46,97 139.46,87.835 143.065,87.835 143.065,97
  region net VMOTOR: 155.755,96.965 155.755,87.8 159.36,87.8 159.36,96.965
  rectangle net AGND: 144,87.5 155,92.2
  rectangle net NetQ10_3: 138.4,113.2 143.3,115.9
  rectangle net NetQ10_3: 145.68,113.25 150.58,115.95
  rectangle net NetQ10_3: 152.88,113.25 157.78,115.95
  rectangle net NetQ10_3: 133.85,87.4 137.95,90.8
  region net NetQ10_3: 137.95,87.4 137.95,92.4 134.25,92.4 134.25,87.4
  rectangle net VMOTOR: 128,95.005 137.165,98.905
  rectangle net VMOTOR: 128.6,111.6 137.1,115.5
  rectangle net VMOTOR: 139.3,121.9 159.3,129.3
  region net C2: 196.4,99.548 172.3,99.548 172.3,95.848 196.4,95.848
  region net C2: 178.4,87.8 178.4,99.6 160,99.6 160,87.8
  rectangle net C1: 194.7,134.4 201.6,137.8
  region net B2: 205.9,122.953 181.8,122.953 181.8,119.253 205.9,119.253
  region net B2: 202.2,122.9 202.2,105.248 205.9,105.248 205.9,122.9
  region net C1: 196.4,132.9 196.4,137.8 194.2,137.8 194.2,132.9
  region net B2: 202.3,109.9 202.3,103.3 205.3,103.3 205.3,109.9
  rectangle net C2: 195,103.3 201.9,106.3
  region net A2: 207.7,93.4 181.9,93.4 181.9,88.4 207.7,88.4
  rectangle net A2: 202.2,100.3 205.271,102.947
  rectangle net NetC6_2: 145.3,133.3 153.2,141.4
  rectangle net NetC8_2: 153.7,140 158.3,141.4
  rectangle net NetC8_2: 160.4,137.1 166,145
  rectangle net NetC8_2: 158.3,133.3 163.3,140.8
  rectangle net NetC21_2: 150.2,104.4 153.4,111.8
  rectangle net NetC21_2: 145.2,104 153.4,110.8
  rectangle net C1: 160,126.6 167.9,132.8
  rectangle net A1: 163.8,107.6 178.5,118.8
  rectangle net NetC23_2: 153.8,107.2 163.4,111.8
  rectangle net A1: 160,112.2 165.6,118.8
  rectangle net A2: 179,87.8 198.1,95.4
  rectangle net B2: 179.3,119.2 197.6,126.1
  rectangle net NetC21_2: 179.3,107.5 200.2,114.6
  rectangle net NetC20_2: 179.3,100 192.5,106.8
  rectangle net B2: 200.8,107.5 205.9,122.9
  rectangle net NetC6_2: 192.6,138.1 206.5,145
  rectangle net AGND: 196.2,131.6 199.3,132.4
  rectangle net 5V_M1: 196.9,132.9 201,133.9
  rectangle net 5V_M2: 197.1,101.1 201.5,102.9
  rectangle net AGND: 197.1,98.8 199.5,100.5
Mid-Layer 1:
  rectangle net 5V: 81.9,121.355 84.2,122.1
  rectangle net 5V: 81.9,100.273 84.2,101.018
  text "Amarsi un po'" at 165.4,101.3 h1
  text "Š un po' fiorire" at 165.2,99.5 h1
  text "aiuta sai" at 165.1,97.7 h1
  text "a non morire." at 165.1,96.1 h1
  text "(Lucio Battisti)" at 165,93.8 h1
Bottom Layer:
  rectangle net NetC6_2: 146.5,136.9 193.76,140.6
  rectangle net NetC5_2: 139.1,132.9 167.5,136.6
  rectangle net NetC20_2: 138.4,103.9 163.3,107.6
  rectangle net NetC21_2: 146.6,107.9 194,111.6
  rectangle net NetC21_2: 181.8,108 194,114.4
  rectangle net NetC20_2: 160.1,96.1 194.1,103.8
  region net NetC5_2: 176,119.3 176,136.6 163.8,136.6 163.8,119.3
  rectangle net NetC5_2: 163.8,119.2 176,122.9
  rectangle net NetC6_2: 181.7,137 193.8,141.9
  region net NetQ3_3: 158,145.2 134.4,145.2 134.4,141.5 158,141.5
  region net NetQ10_3: 158.18,115.95 134.6,115.95 134.6,112.25 158.18,112.25
  rectangle net VMOTOR: 139.3,121.9 159.3,129.3
  rectangle net VMOTOR: 139.46,92.7 159.46,100.1
  rectangle net A1: 194.3,115 206.2,122.4
  region net A1: 208.7,115 208.7,124.2 205,124.2 205,115
  rectangle net A1: 202.5,132 205.1,134.655
  rectangle net NetC5_2: 139.1,135.4 145.5,140.8
  rectangle net NetC20_2: 139.4,104.4 146.3,111.1
  rectangle net NetC6_2: 159.9,139.1 193.8,145.2
  rectangle net NetC5_2: 146.6,131.2 167.5,136.6
  rectangle net NetC5_2: 154.5,129.6 167.1,133.3
  rectangle net NetC20_2: 154,100.6 163.3,107.6
  rectangle net NetC21_2: 163.9,104.3 194,111.6
  rectangle net B2: 182.4,119.4 193.8,122.4
  pour cut-out: 212.079,123.9 208.6,123.9 208.6,108.2 212.079,108.2
  text "2012-04-05" at 207,143.2 h1.27
  text "motor driver" at 210.4,123.1 h1.27 r90
  text "E" at 192.6,115.2 h3.38

## Silkscreen, mask and mechanical layers (free items; w line width, h text height)
Top Overlay:
  region: 98.679,144.653 99.314,145.796 98.044,145.796
  text "6V" at 109.1,144 h0.76
  text "PGND" at 111.9,144 h0.76
  text "PGND" at 115.3,144 h0.76
  text "6V" at 119.7,144 h0.76
  text "24V" at 122.7,144 h0.76
  text "GND" at 105.283,142.748 h0.64
  text "MOTOR1" at 202,140.6 h1
  text "GND" at 105.283,140.208 h0.64
  text "MC" at 199.2,136.3 h0.76 r90
  text "MB" at 205.8,135.7 h0.76 r90
  text "5V" at 195.8,132.7 h0.76 r90
  text "MA" at 205.8,132.7 h0.76 r90
  text "H1" at 199.2,129.8 h0.76 r90
  text "GND" at 205.8,129.3 h0.76 r90
  text "H3" at 199.3,126.7 h0.76 r90
  text "H2" at 205.8,126.7 h0.76 r90
  text "- CAP +" at 129.6,123.1 h0.95
  text "O n c i l l a" at 211.2,110.8 h2.5 r90
  text "¢" at 209,109.8 h3.69 r90
  text "MC" at 199.1,104.9 h0.76 r90
  text "MB" at 205.7,104.25 h0.76 r90
  text "5V" at 195.8,101.4 h0.76 r90
  text "MA" at 205.7,101.25 h0.76 r90
  text "H1" at 199.1,98.35 h0.76 r90
  text "GND" at 205.7,97.85 h0.76 r90
  text "H3" at 199.2,95.25 h0.76 r90
  text "H2" at 205.7,95.25 h0.76 r90
  text "- CAP +" at 129.4,93.6 h0.95
  text "MOTOR2" at 201.1,90.1 h1
Mechanical 1:
  the board outline again, w0.1
Mechanical 2:
  the board outline again, w0.1
Mechanical 3:
  text "." at 98.3,132.9 h1.52

## Dimensions
77.9,146.1 to 77.9,142.6 on Mechanical 1
81,146.5 to 78.5,146.6 on Mechanical 1
212.7,146.2 to 210.2,146.2 on Mechanical 1
212.8,146.1 to 212.8,142.6 on Mechanical 1
78.5,85.8 to 212.7,86.4 on Mechanical 1
77.9,86.4 to 77.9,146.1 on Mechanical 1